# Altium PCB adio.PCBDOC (part 2 of 3)
Units mil, origin at the board's own origin, x right, y up, seen from the top; angles counter-clockwise.
Board outline 7750 x 4500 mil, 6 copper layers (Top Layer, Internal Plane 1, Mid-Layer 1, Mid-Layer 2, Internal Plane 2, Bottom Layer); 163 components, 231 nets, 1195 pads, 503 vias.
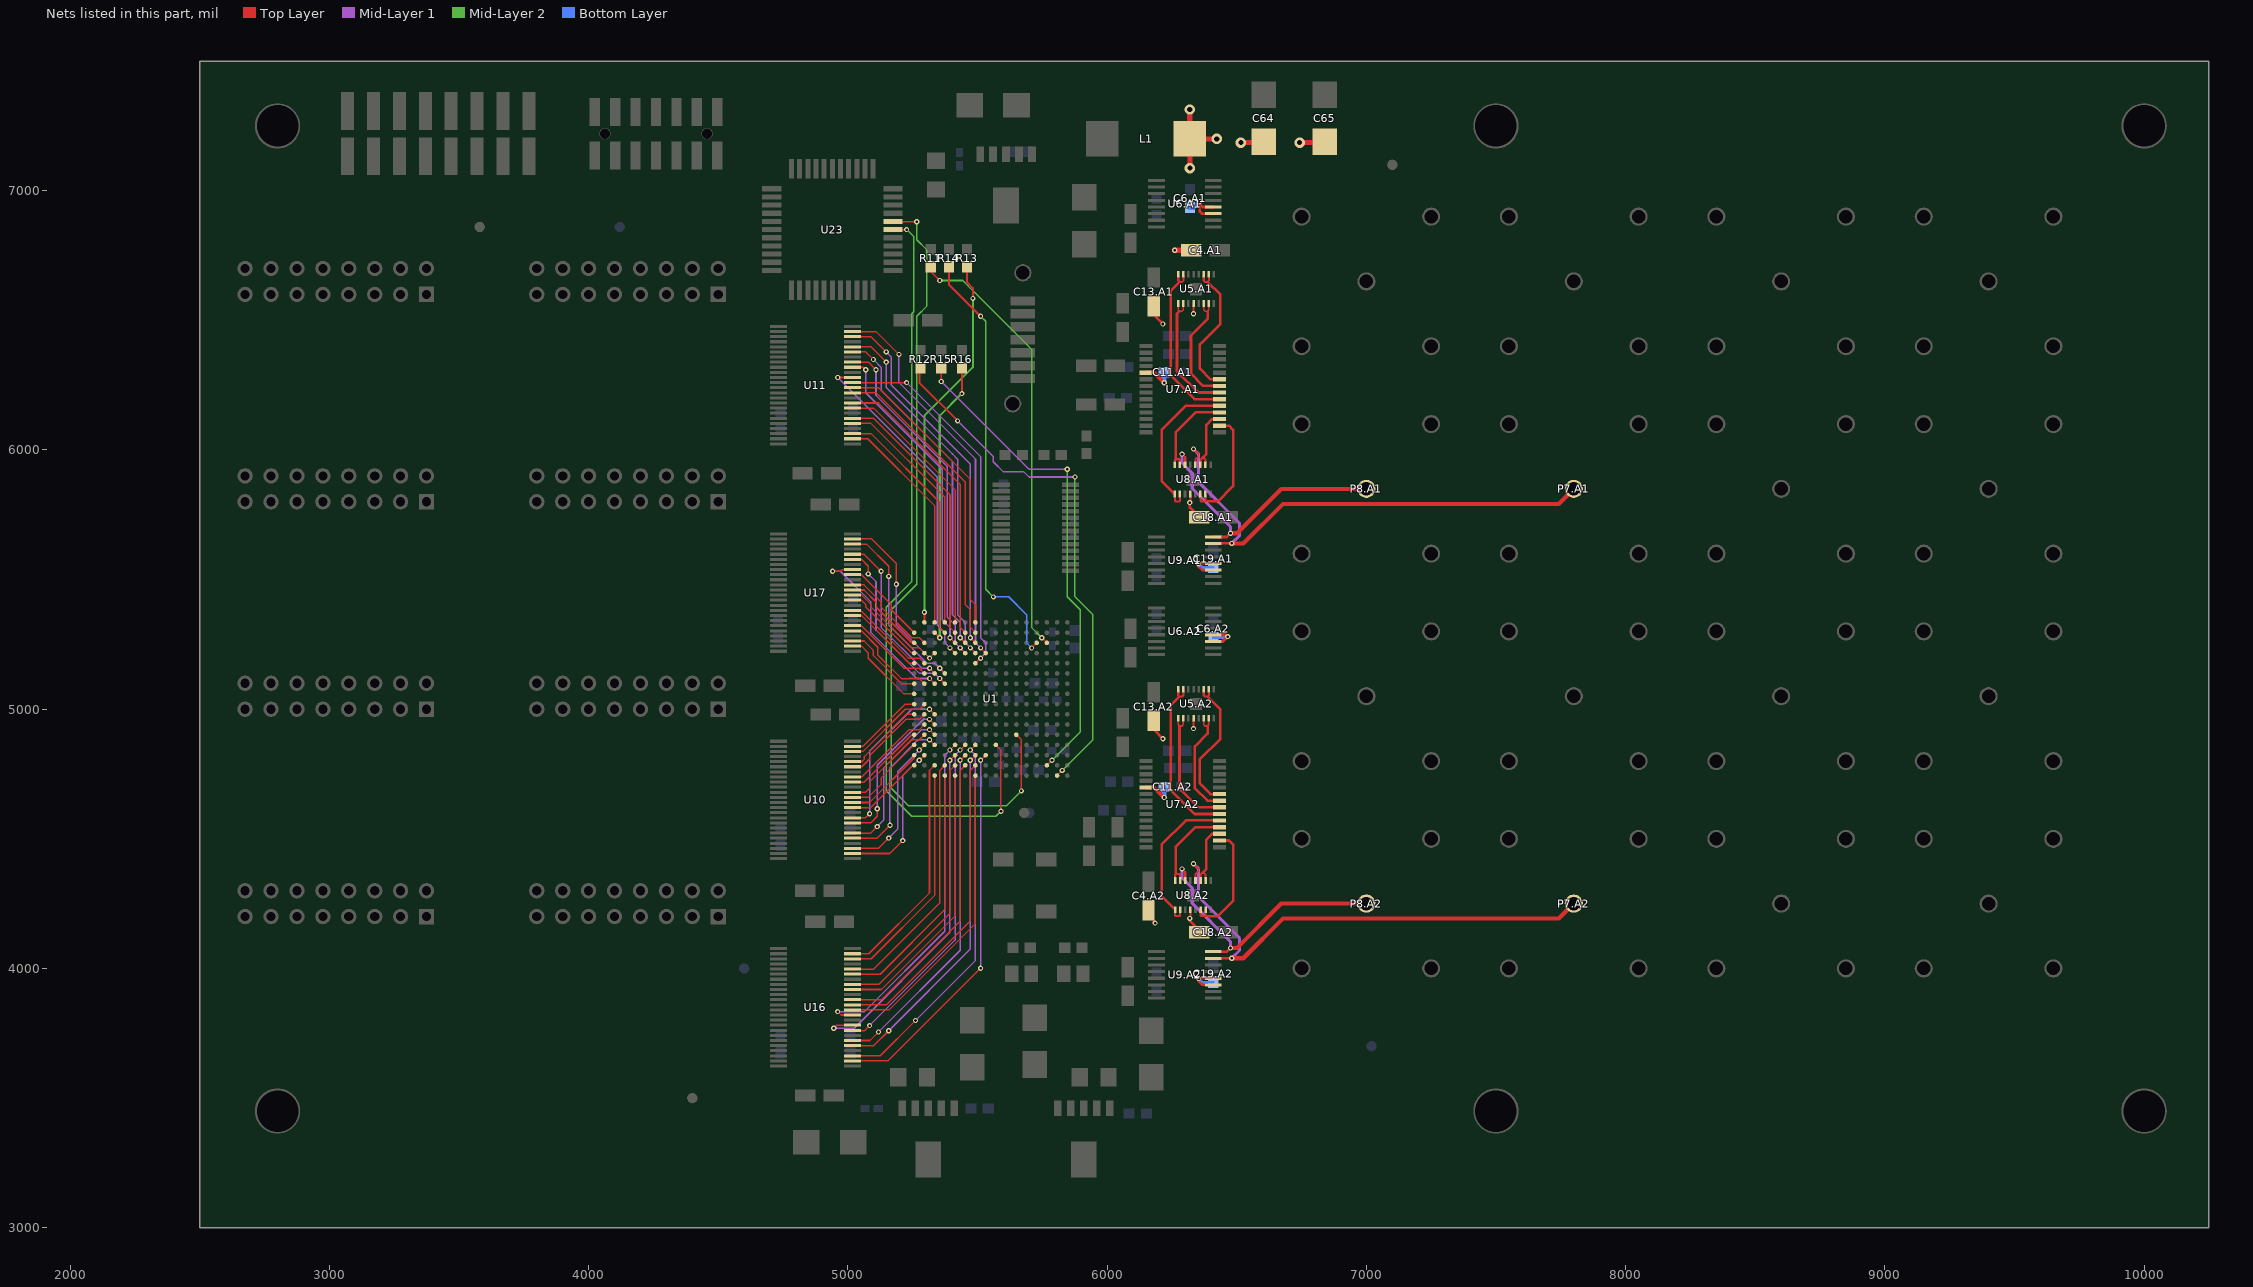
[diagram p6: the nets of this part, all layers, seen from the top]

## Via types
v1: diameter 20, hole 10, Top Layer to Bottom Layer, 322 vias
v2: diameter 20, hole 10, Top Layer to Bottom Layer, tented top, 122 vias
v3: diameter 40, hole 20, Top Layer to Bottom Layer, 57 vias
v4: diameter 40, hole 25, Top Layer to Bottom Layer, 2 vias

## Nets (pads, with @x,y where several pads share a name; then routed paths per layer and width w, separated by ;. In a path a pad name is that pad's centre, name@x,y a point inside that pad or via, vN(x,y) a via of type N, cw(c..) or ccw(c..) an arc to the next point about the centre after c; other vN are vias at no path point) (continued)
ADIO6.A1: P7.A1.1 U8.A1.12 U9.A1.7 | length 2006.7
  Top Layer w8: v1(6333.33,6003.62) 6353.01,5983.94 6353.01,5976.18 6340.63,5963.8 U8.A1.12@6340.63,5940
  Top Layer w10: U9.A1.7@6407.14,5639.47 v1(6480.96,5639.47)
  Top Layer w16: v1(6480.96,5639.47) 6525.25,5639.47 6677.8,5792.02 7742.02,5792.02 P7.A1.1@7800,5850
  Mid-Layer 1 w12: v1(6333.33,6003.62) 6353.01,5983.94 6353.01,5875.67 6510.48,5718.2 6510.48,5668.99 v1(6480.96,5639.47)
ADIO6.A2: P7.A2.1 U8.A2.12 U9.A2.7 | length 2006.7
  Top Layer w8: v1(6333.33,4403.62) 6353.01,4383.94 6353.01,4376.18 6340.63,4363.8 U8.A2.12@6340.63,4340
  Top Layer w10: U9.A2.7@6407.14,4039.47 v1(6480.96,4039.47)
  Top Layer w16: v1(6480.96,4039.47) 6525.25,4039.47 6677.8,4192.02 7742.02,4192.02 P7.A2.1@7800,4250
  Mid-Layer 1 w12: v1(6333.33,4403.62) 6353.01,4383.94 6353.01,4275.67 6510.48,4118.2 6510.48,4068.99 v1(6480.96,4039.47)
ADIO7.A1: P8.A1.1 U8.A1.14 U9.A1.8 | length 1106.4
  Top Layer w8: v1(6289.04,5983.94) 6301.26,5971.71 U8.A1.14@6301.26,5940
  Top Layer w10: U9.A1.8@6407.14,5664.07 6461.27,5664.07 v1(6476.04,5678.83)
  Top Layer w16: v1(6476.04,5678.83) 6500.64,5678.83 6671.81,5850 P8.A1.1@7000,5850
  Mid-Layer 1 w12: v1@6293.96,5983.94 v1(6289.04,5983.94) 6289.04,5949.49 6328.41,5910.12 6328.41,5851.07 6476.04,5703.44 v1(6476.04,5678.83)
ADIO7.A2: P8.A2.1 U8.A2.14 U9.A2.8 | length 1106.4
  Top Layer w8: v1(6289.04,4383.94) 6301.26,4371.71 U8.A2.14@6301.26,4340
  Top Layer w10: U9.A2.8@6407.14,4064.07 6461.27,4064.07 v1(6476.04,4078.83)
  Top Layer w16: v1(6476.04,4078.83) 6500.64,4078.83 6671.81,4250 P8.A2.1@7000,4250
  Mid-Layer 1 w12: v1@6293.96,4383.94 v1(6289.04,4383.94) 6289.04,4349.49 6328.41,4310.12 6328.41,4251.07 6476.04,4103.44 v1(6476.04,4078.83)
AIOBUF0.A1: U5.A1.1 U5.A1.2 U7.A1.7 | length 502.5
  Top Layer w6: U5.A1.1@6274.45,6562.72 6274.45,6539.84 6279.2,6535.09 6289.04,6535.09 6294.13,6540.18 U5.A1.2@6294.13,6562.72
  Top Layer w10: 6279.2,6535.09 6269.69,6525.58 6269.69,6303.47 6351.7,6221.46 U7.A1.7@6433.46,6221.46
AIOBUF0.A2: U5.A2.1 U5.A2.2 U7.A2.7 | length 494.6
  Top Layer w6: U5.A2.1@6274.45,4962.72 6274.45,4939.84 6279.2,4935.09 6289.04,4935.09 6294.13,4940.18 U5.A2.2@6294.13,4962.72
  Top Layer w10: 6279.2,4935.09 6279.2,4693.96 6351.7,4621.46 U7.A2.7@6433.46,4621.46
AIOBUF1.A1: U5.A1.6 U5.A1.7 U7.A1.8 | length 466.2
  Top Layer w6: U5.A1.6@6372.87,6562.72 6372.87,6539.83 6377.62,6535.09 6387.46,6535.09 6392.56,6540.19 U5.A1.7@6392.56,6562.72
  Top Layer w10: 6387.46,6535.09 6387.46,6505.56 6323.48,6441.59 6323.48,6293.96 6370.4,6247.05 U7.A1.8@6433.46,6247.05
AIOBUF1.A2: U5.A2.6 U5.A2.7 U7.A2.8 | length 444.3
  Top Layer w6: U5.A2.6@6372.87,4962.72 6372.87,4939.83 6377.62,4935.09 6387.46,4935.09 6392.56,4940.19 U5.A2.7@6392.56,4962.72
  Top Layer w10: 6387.46,4935.09 6387.46,4905.56 6338.58,4856.69 6338.58,4694.88 6386.42,4647.05 U7.A2.8@6433.46,4647.05
AIOBUF2.A1: U5.A1.10 U5.A1.11 U7.A1.9 | length 547.4
  Top Layer w8: U5.A1.11@6372.87,6674.92 6372.87,6653.02 6377.62,6648.27 6387.46,6648.27 6392.56,6653.37 U5.A1.10@6392.56,6674.92
  Top Layer w10: 6387.46,6648.27 6436.67,6599.06 6436.67,6485.88 6357.93,6407.14 6357.93,6313.64 6398.94,6272.64 U7.A1.9@6433.46,6272.64
AIOBUF2.A2: U5.A2.10 U5.A2.11 U7.A2.9 | length 547.4
  Top Layer w8: U5.A2.11@6372.87,5074.92 6372.87,5053.02 6377.62,5048.27 6387.46,5048.27 6392.56,5053.37 U5.A2.10@6392.56,5074.92
  Top Layer w10: 6387.46,5048.27 6436.67,4999.06 6436.67,4885.88 6357.93,4807.14 6357.93,4713.64 6398.94,4672.64 U7.A2.9@6433.46,4672.64
AIOBUF3.A1: U5.A1.15 U5.A1.16 U7.A1.6 | length 668
  Top Layer w8: U5.A1.16@6274.45,6674.92 6274.45,6653.02 6279.2,6648.27 6289.04,6648.27 6294.13,6653.36 U5.A1.15@6294.13,6674.92
  Top Layer w10: 6279.2,6648.27 6244.75,6613.82 6244.75,6289.04 6337.92,6195.87 U7.A1.6@6433.46,6195.87
AIOBUF3.A2: U5.A2.15 U5.A2.16 U7.A2.6 | length 668
  Top Layer w8: U5.A2.16@6274.45,5074.92 6274.45,5053.02 6279.2,5048.27 6289.04,5048.27 6294.13,5053.36 U5.A2.15@6294.13,5074.92
  Top Layer w10: 6279.2,5048.27 6244.75,5013.82 6244.75,4689.04 6337.92,4595.87 U7.A2.6@6433.46,4595.87
AIOBUF4.A1: U7.A1.5 U8.A1.1 U8.A1.2 | length 609.7
  Top Layer w8: 6255.78,5833.91 6261.89,5827.8 6261.89,5804.4 6264.43,5801.86 6279.2,5801.86 6281.57,5804.24 U8.A1.2@6281.57,5827.8
  Top Layer w10: 6255.78,5833.91 6210.3,5879.38 6210.3,6077.44 6303.8,6170.93 U7.A1.5@6441.59,6170.93
AIOBUF4.A2: U7.A2.5 U8.A2.1 U8.A2.2 | length 609.7
  Top Layer w8: 6255.78,4233.91 6261.89,4227.8 6261.89,4204.4 6264.43,4201.86 6279.2,4201.86 6281.57,4204.24 U8.A2.2@6281.57,4227.8
  Top Layer w10: 6255.78,4233.91 6210.3,4279.38 6210.3,4477.44 6303.8,4570.93 U7.A2.5@6441.59,4570.93
AIOBUF5.A1: U7.A1.2 U8.A1.6 U8.A1.7 | length 477
  Top Layer w8: U8.A1.6@6360.31,5827.8 6360.31,5804.4 6362.85,5801.86 6377.62,5801.86 6380,5804.24 U8.A1.7@6380,5827.8
  Top Layer w10: 6377.62,5801.86 6426.83,5801.86 6485.88,5860.91 6485.88,6077.44 6469.81,6093.5 U7.A1.2@6433.46,6093.5
AIOBUF5.A2: U7.A2.2 U8.A2.6 U8.A2.7 | length 477
  Top Layer w8: U8.A2.6@6360.31,4227.8 6360.31,4204.4 6362.85,4201.86 6377.62,4201.86 6380,4204.24 U8.A2.7@6380,4227.8
  Top Layer w10: 6377.62,4201.86 6426.83,4201.86 6485.88,4260.91 6485.88,4477.44 6469.81,4493.5 U7.A2.2@6433.46,4493.5
AIOBUF6.A1: U7.A1.3 U8.A1.10 U8.A1.11 | length 263.7
  Top Layer w8: U8.A1.11@6360.31,5940 6360.31,5961.71 6367.38,5968.78 6373.09,5968.78 6380,5961.87 U8.A1.10@6380,5940
  Top Layer w10: 6367.38,5968.78 6382.54,5983.94 6382.54,6097.12 6404.51,6119.09 U7.A1.3@6433.46,6119.09
AIOBUF6.A2: U7.A2.3 U8.A2.10 U8.A2.11 | length 263.7
  Top Layer w8: U8.A2.11@6360.31,4340 6360.31,4361.71 6367.38,4368.78 6373.09,4368.78 6380,4361.87 U8.A2.10@6380,4340
  Top Layer w10: 6367.38,4368.78 6382.54,4383.94 6382.54,4497.12 6404.51,4519.09 U7.A2.3@6433.46,4519.09
AIOBUF7.A1: U7.A1.4 U8.A1.15 U8.A1.16 | length 369.6
  Top Layer w8: U8.A1.16@6261.89,5940 6261.89,5961.71 6264.43,5964.25 6279.2,5964.25 6281.57,5961.87 U8.A1.15@6281.57,5940
  Top Layer w10: 6264.43,5964.25 6264.43,6067.59 6341.52,6144.69 U7.A1.4@6433.46,6144.69
AIOBUF7.A2: U7.A2.4 U8.A2.15 U8.A2.16 | length 369.6
  Top Layer w8: U8.A2.16@6261.89,4340 6261.89,4361.71 6264.43,4364.25 6279.2,4364.25 6281.57,4361.87 U8.A2.15@6281.57,4340
  Top Layer w10: 6264.43,4364.25 6264.43,4467.59 6341.52,4544.69 U7.A2.4@6433.46,4544.69
AVDD: C4.A1.1 C4.A2.1 C6.A1.1 C6.A2.1 C11.A1.1 C11.A2.1 C13.A1.1 C13.A2.1 C18.A1.1 C18.A2.1 C19.A1.1 C19.A2.1 C64.1 C65.1 L1.2 U5.A1.4 U5.A2.4 U6.A1.3 U6.A1.4 U6.A2.3 U6.A2.4 U7.A1.19 U7.A2.19 U8.A1.4 U8.A2.4 U9.A1.3 U9.A1.4 U9.A2.3 U9.A2.4 | length 2132.3
  Top Layer w8: C4.A2.1@6175,4205 6175,4230 6169.88,4224.88 C4.A2.1@6160,4224.88 6160,4200 v1(6185,4175) ; v1(6318.56,5796.94) 6320.94,5799.29 U8.A1.4@6320.94,5827.8 ; v1(6318.9,4192.91) 6320.94,4194.96 U8.A2.4@6320.94,4227.8 ; v1(6333.33,4925.25) U5.A2.4@6333.33,4964.61 ; v1(6333.33,6525.25) U5.A1.4@6333.33,6564.61
  Top Layer w10: C13.A2.1@6180,4954.88 6180,4921.1 v1(6215.22,4885.88) ; C13.A1.1@6180,6554.88 6180,6521.1 v1(6215.22,6485.88) ; v1(6318.9,4192.91) 6318.9,4183.58 6354.88,4147.6 C18.A2.1@6354.88,4140 ; v1@6319.12,5796.38 6319.12,5777.93 6354.88,5742.17 C18.A1.1@6354.88,5740 ; v1(6353.01,3960.73) 6353.01,3950.89 6367.28,3936.61 U9.A2.3@6409.25,3936.61 ; v1(6353.01,5560.73) 6353.01,5550.89 6367.28,5536.61 U9.A1.3@6409.25,5536.61 ; v1@6354.49,3962.2 U9.A2.4@6409.25,3962.2 ; v1@6354.49,5562.2 U9.A1.4@6409.25,5562.2 ; 6357.93,6947.05 6367.77,6937.2 U6.A1.4@6409.25,6937.2 ; v1(6357.93,6958.29) 6357.93,6918.93 6365.24,6911.61 U6.A1.3@6409.25,6911.61
  Top Layer w12: U6.A2.3@6409.25,5261.61 6446.61,5261.61 v1(6465,5280) 6457.8,5287.2 U6.A2.4@6409.25,5287.2
  Top Layer w16: U7.A2.19@6150,4698.23 6181.43,4698.23 v1(6220.14,4659.51) ; U7.A1.19@6150,6298.23 6181.43,6298.23 v1(6220.14,6259.51)
  Top Layer w20: v1(6260.81,6770) C4.A1.1@6324.88,6770 ; v3(6319,7313.14) L1.2@6319,7200 v3(6422.71,7200) ; v3(6319.21,7086.96) L1.2@6319.21,7195.23 ; v3(6516.07,7185.39) C64.1@6604.65,7185.39 ; v3(6742.45,7185.39) C65.1@6840.89,7185.39
  Bottom Layer w10: v1(6353.01,3960.73) 6367.28,3946.46 C19.A2.1@6409.25,3946.46 ; v1(6353.01,5560.73) 6367.28,5546.46 C19.A1.1@6409.25,5546.46 ; C6.A2.1@6410,5276.54 v1@6461.54,5276.54
  Bottom Layer w16: v1(6220.14,4659.51) C11.A2.1@6220.14,4698.88 ; v1(6220.14,6259.51) C11.A1.1@6220.14,6298.88 ; C6.A1.1@6318.56,6933.69 6333.33,6933.69 v1(6357.93,6958.29)
DIN0: U1.D8 U11.47 | length 1506.3
  Top Layer w6: U11.47@5017.72,6456.69 5108.83,6456.69 v1(5197.1,6368.42) ; v2(5512.08,5236.48) 5531.5,5217.06 U1.D8@5531.5,5216.54
  Mid-Layer 1 w6: v1(5197.1,6368.42) 5197.1,6260.15 5492.39,5964.86 5492.39,5256.16 v2(5512.08,5236.48)
DIN1: U1.C7 U11.46 | length 1419.5
  Top Layer w6: U11.46@5017.72,6437.01 5089.15,6437.01 v1(5147.89,6378.26) ; v2(5472.71,5275.85) 5472.71,5275.32 U1.C7@5492.13,5255.91
  Mid-Layer 1 w6: v1(5147.89,6378.26) 5167.57,6358.58 5167.57,6250.31 5472.71,5945.17 v2(5472.71,5275.85)
DIN2: U1.D7 U11.44 | length 1419.3
  Top Layer w6: U11.44@5017.72,6397.64 5089.14,6397.64 v1(5147.89,6338.89) ; v2(5472.71,5236.48) 5492.13,5217.06 U1.D7@5492.13,5216.54
  Mid-Layer 1 w6: v1(5147.89,6338.89) 5147.89,6240.46 5403.82,5984.53 ; 5403.54,5984.25 5423.23,5964.57 5423.23,5364.17 5453.02,5334.38 5453.02,5256.16 v2(5472.71,5236.48)
DIN3: U1.C6 U11.43 | length 1330.3
  Top Layer w6: U11.43@5019.93,6378.26 5069.15,6378.26 v1(5098.67,6348.73) ; v2(5433.34,5275.85) 5452.76,5256.43 U1.C6@5452.76,5255.91
  Mid-Layer 1 w6: v1(5098.67,6348.73) 5128.2,6319.21 5128.2,6230.62 5403.82,5955 ; 5403.54,5954.72 5403.54,5364.17 5433.34,5334.38 v2(5433.34,5275.85)
DIN4: U1.D6 U11.41 | length 1338.3
  Top Layer w6: U11.41@5017.72,6338.58 5079.3,6338.58 v1(5108.52,6309.36) ; v2(5433.34,5236.48) 5452.76,5217.06 U1.D6@5452.76,5216.54
  Mid-Layer 1 w6: v1(5108.52,6309.36) 5108.52,6210.38 5383.86,5935.04 5383.86,5354.33 5413.65,5324.54 5413.65,5256.16 v2(5433.34,5236.48)
DIN5: U1.C5 U11.40 | length 1251.1
  Top Layer w6: U11.40@5017.72,6318.9 5059.61,6318.9 v1(5069.15,6309.36) ; v2(5393.96,5275.85) 5413.39,5256.43 U1.C5@5413.39,5255.91
  Mid-Layer 1 w6: v1@5069.45,6309.36 5069.45,6220.47 5344.76,5945.16 ; 5344.49,5944.88 5364.17,5925.2 5364.17,5344.75 5393.96,5314.96 v2(5393.96,5275.85)
DIN6: U1.D5 U11.38 | length 1306.8
  Top Layer w6: v1(4961.18,6279.53) U11.38@5017.72,6279.53 ; v2(5393.96,5236.48) 5413.39,5217.05 U1.D5@5413.39,5216.54
  Mid-Layer 1 w6: v1(4961.18,6279.53) 5315.23,5925.47 ; 5314.96,5925.2 5344.49,5895.67 5344.49,5324.8 5374.02,5295.28 5374.28,5295.28 5374.28,5256.16 v2(5393.96,5236.48)
DIN7: U1.E7 U11.37 | length 1434
  Top Layer w6: U11.37@5017.72,6259.84 v1(5226.38,6259.84) ; U1.E7@5492.13,5177.17 v2(5511.81,5196.85)
  Mid-Layer 1 w6: v1(5226.38,6259.84) 5511.81,5974.41 5511.81,5275.59 5531.5,5255.91 5531.5,5216.54 v2(5511.81,5196.85)
DIN8: U1.A7 U11.36 | length 1160.8
  Top Layer w6: U11.36@5017.72,6240.16 5118.66,6240.16 5472.72,5886.1 ; 5472.44,5885.83 5472.44,5423.5 5492.39,5403.54 U1.A7@5492.39,5334.91
DIN9: U1.B7 U11.35 | length 1175.1
  Top Layer w6: U11.35@5017.72,6220.47 5108.82,6220.47 5452.76,5876.54 5452.76,5403.54 5472.71,5383.59 5472.71,5315.22 5492.13,5295.8 U1.B7@5492.13,5295.28
DIN10: U1.B6 U11.33 | length 1125.2
  Top Layer w6: U11.33@5017.72,6181.1 5118.66,6181.1 5433.34,5866.43 5433.34,5315.22 5452.76,5295.8 U1.B6@5452.76,5295.28
DIN11: U1.A5 U11.32 | length 1038.3
  Top Layer w6: U11.32@5017.72,6161.42 5098.98,6161.42 5413.39,5847.01 U1.A5@5413.39,5334.65
DIN12: U1.B5 U11.30 | length 1038.3
  Top Layer w6: U11.30@5017.72,6122.05 5098.97,6122.05 5393.96,5827.06 5393.96,5315.22 5413.39,5295.8 U1.B5@5413.39,5295.28
DIN13: U1.A4 U11.29 | length 976.7
  Top Layer w6: U11.29@5017.72,6102.36 5089.13,6102.36 5374.28,5817.21 5374.28,5364.44 ; U1.A4@5374.02,5334.65 5374.02,5383.86
DIN14: U1.B4 U11.27 | length 957.1
  Top Layer w6: U11.27@5017.72,6062.99 5089.13,6062.99 5354.33,5797.79 5354.33,5315.48 5374.02,5295.8 U1.B4@5374.02,5295.28
DIN15: U1.A3 U11.26 | length 874.5
  Top Layer w6: U11.26@5017.72,6043.31 5076.69,6043.31 5334.65,5785.35 U1.A3@5334.65,5334.65
DIN16: U1.D3 U17.47 | length 653.8
  Top Layer w6: U17.47@5017.72,5656.69 5091.86,5656.69 5187.26,5561.3 v1@5187.26,5482.28 ; v2(5315.22,5197.1) U1.D3@5334.65,5216.54
  Mid-Layer 1 w6: v1(5187.01,5482.28) 5187.26,5482.03 5187.26,5325.06 v2(5315.22,5197.1)
DIN17: U1.F4 U17.46 | length 696
  Top Layer w6: U17.46@5017.72,5637.01 5072.18,5637.01 5157.73,5551.45 v1(5157.73,5512.08) ; v2(5354.59,5157.73) 5374.02,5138.31 U1.F4@5374.02,5137.8
  Mid-Layer 1 w6: v1(5157.73,5512.08) 5157.73,5325.06 5305.38,5177.42 5334.91,5177.42 v2(5354.59,5157.73)
DIN18: U1.F3 U17.44 | length 634.6
  Top Layer w6: U17.44@5017.72,5597.64 5062.33,5597.64 v1(5128.2,5531.77) ; v2(5315.22,5157.73) 5334.65,5138.31 U1.F3@5334.65,5137.8
  Mid-Layer 1 w6: v1(5128.2,5531.77) 5128.2,5315.22 5285.69,5157.73 v2(5315.22,5157.73)
DIN19: U1.G4 U17.43 | length 682.1
  Top Layer w6: U17.43@5017.72,5577.95 5052.49,5577.95 5078.99,5551.45 v1(5078.99,5521.92) ; v2(5354.59,5118.36) 5374.02,5098.94 U1.G4@5374.02,5098.43
  Mid-Layer 1 w6: v1(5078.99,5521.92) 5108.52,5492.39 5108.52,5305.38 5275.85,5138.05 5334.91,5138.05 v2(5354.59,5118.36)
DIN20: U1.G3 U17.41 | length 721.8
  Top Layer w6: v1(4941.19,5531.77) 4970.72,5531.77 4977.53,5538.58 U17.41@5017.72,5538.58 ; v2(5315.22,5118.36) 5334.65,5098.93 U1.G3@5334.65,5098.43
  Mid-Layer 1 w6: v1(4941.19,5531.77) 4970.72,5531.77 5088.83,5413.65 5088.83,5295.53 5266.01,5118.36 v2(5315.22,5118.36)
DIN21: U1.B1 U17.40 | length 342.6
  Top Layer w6: U17.40@5017.72,5518.9 5052.48,5518.9 5167.57,5403.81 5167.57,5383.61 U1.B1@5255.91,5295.28
DIN22: U1.C2 U17.38 | length 382
  Top Layer w6: U17.38@5017.72,5479.53 5062.32,5479.53 5128.2,5413.65 5128.2,5393.96 5246.32,5275.85 5275.85,5275.85 5275.85,5275.33 U1.C2@5295.28,5255.91
DIN23: U1.C1 U17.37 | length 334.2
  Top Layer w6: U17.37@5017.72,5459.84 5062.32,5459.84 5109.34,5412.82 5109.34,5393.14 5246.58,5255.91 U1.C1@5255.91,5255.91
DIN24: U1.D2 U17.36 | length 376.3
  Top Layer w6: U17.36@5017.72,5440.16 5052.48,5440.16 5088.83,5403.81 5088.83,5393.96 5246.32,5236.48 5275.85,5236.48 5275.85,5235.96 U1.D2@5295.28,5216.54
DIN25: U1.D1 U17.35 | length 328.4
  Top Layer w6: U17.35@5017.72,5420.47 5052.48,5420.47 5069.15,5403.81 5069.15,5393.96 5246.57,5216.54 U1.D1@5255.91,5216.54
DIN26: U1.E2 U17.33 | length 362.3
  Top Layer w6: U17.33@5017.72,5381.1 5049.76,5381.1 5233.76,5197.1 5275.85,5197.1 5275.85,5196.59 U1.E2@5295.28,5177.17
DIN27: U1.E1 U17.32 | length 314.2
  Top Layer w6: U17.32@5017.72,5361.42 5052.48,5361.42 5236.48,5177.42 U1.E1@5255.65,5177.42
DIN28: U1.F2 U17.30 | length 353.9
  Top Layer w6: U17.30@5017.72,5322.05 5052.48,5322.05 5216.79,5157.73 5275.34,5157.73 U1.F2@5295.28,5137.8
DIN29: U1.G2 U17.29 | length 380
  Top Layer w6: U17.29@5017.72,5302.36 5052.47,5302.36 5115.48,5239.35 5115.48,5209.32 5206.69,5118.11 5236.22,5118.11 ; 5236.22,5118.36 5275.85,5118.36 5275.85,5117.85 U1.G2@5295.28,5098.43
DIN30: U1.G1 U17.27 | length 318
  Top Layer w6: U17.27@5017.72,5262.99 5062.31,5262.99 5098.68,5226.63 ; 5098.43,5226.38 5098.43,5206.69 5206.69,5098.43 U1.G1@5255.91,5098.43
DIN31: U1.H1 U17.26 | length 326.2
  Top Layer w6: U17.26@5017.72,5243.31 5052.47,5243.31 5078.99,5216.79 ; 5078.74,5216.54 5078.74,5196.85 5216.54,5059.06 U1.H1@5255.91,5059.06
DOUT0: U1.J1 U10.47 | length 305.6
  Top Layer w6: U10.47@5017.72,4856.69 5058.46,4856.69 5221.7,5019.93 U1.J1@5255.66,5019.93
DOUT1: U1.J2 U10.46 | length 353.2
  Top Layer w6: U10.46@5017.72,4837.01 5058.46,4837.01 5221.7,5000.24 5275.85,5000.24 U1.J2@5295.28,5019.69
DOUT2: U1.K1 U10.44 | length 319.6
  Top Layer w6: U10.44@5017.72,4797.64 5053.54,4797.64 5063.98,4808.07 5063.98,4817.91 5226.38,4980.31 U1.K1@5255.91,4980.31
DOUT3: U1.K2 U10.43 | length 368.7
  Top Layer w6: U10.43@5017.72,4777.95 5053.54,4777.95 5084.04,4808.45 5084.04,4821.01 5223.91,4960.87 5275.85,4960.87 ; 5275.85,4960.89 U1.K2@5295.28,4980.31
DOUT4: U1.L2 U10.41 | length 361.4
  Top Layer w6: U10.41@5017.72,4738.58 5053.56,4738.58 5236.48,4921.5 5275.85,4921.5 U1.L2@5295.28,4940.94
DOUT5: U1.M1 U10.40 | length 313.9
  Top Layer w6: U10.40@5017.72,4718.9 5063.39,4718.9 5246.06,4901.57 U1.M1@5255.91,4901.57
DOUT6: U1.M2 U10.38 | length 383.9
  Top Layer w6: U10.38@5017.72,4679.53 5068.31,4679.53 5083.66,4694.88 5083.66,4719.49 5246.3,4882.13 5275.83,4882.13 U1.M2@5295.28,4901.57
DOUT7: U1.N1 U10.37 | length 336.4
  Top Layer w6: U10.37@5017.72,4659.84 5078.15,4659.84 5127.95,4709.65 5127.95,4734.25 5236.22,4842.52 U1.N1@5255.91,4862.2
DOUT8: U1.P1 U10.36 | length 319.6
  Top Layer w6: U10.36@5017.72,4640.16 5083.07,4640.16 5255.91,4812.99 U1.P1@5255.91,4822.83
DOUT9: U1.R1 U10.35 | length 305.7
  Top Layer w6: U10.35@5017.72,4620.47 5087.99,4620.47 5250.98,4783.46 U1.R1@5255.91,4783.46
DOUT10: U1.K3 U10.33 | length 639.9
  Top Layer w6: U10.33@5017.72,4581.1 5068.31,4581.1 v1(5083.66,4596.46) ; v2(5314.96,5000) U1.K3@5334.65,4980.31
  Mid-Layer 1 w6: v1(5083.66,4596.46) 5083.66,4837.6 5246.06,5000 v2(5314.96,5000)
DOUT11: U1.L3 U10.32 | length 605.8
  Top Layer w6: U10.32@5017.72,4561.42 5087.99,4561.42 5113.19,4586.61 v1(5113.19,4616.14) ; v2(5314.96,4960.63) U1.L3@5334.65,4940.94
  Mid-Layer 1 w6: v1(5113.19,4616.14) 5113.19,4783.46 5290.35,4960.63 v2(5314.96,4960.63)
DOUT12: U1.M3 U10.30 | length 608.6
  Top Layer w6: U10.30@5017.72,4522.05 5087.99,4522.05 v1(5113.19,4547.24) ; v2(5314.96,4921.26) U1.M3@5334.65,4901.57
  Mid-Layer 1 w6: v1(5113.19,4547.24) 5137.8,4571.85 5137.8,4773.62 5285.43,4921.26 v2(5314.96,4921.26)
DOUT13: U1.N3 U10.29 | length 609.8
  Top Layer w6: U10.29@5019.69,4502.95 5113.19,4502.95 v1(5162.4,4552.17) ; v2(5314.96,4881.89) U1.N3@5334.65,4862.2
  Mid-Layer 1 w6: v1(5162.4,4552.17) 5162.4,4773.62 5270.67,4881.89 v2(5314.96,4881.89)
DOUT14: U1.N2 U10.27 | length 572.6
  Top Layer w6: U10.27@5017.72,4462.99 5117.52,4462.99 v1(5157.48,4502.95) ; v2(5275.59,4842.52) U1.N2@5295.28,4862.2
  Mid-Layer 1 w6: v1(5157.48,4502.95) 5191.93,4537.4 5191.93,4758.86 v2(5275.59,4842.52)
DOUT15: U1.P2 U10.26 | length 576.9
  Top Layer w6: U10.26@5017.72,4443.31 5161.81,4443.31 v1(5211.61,4493.11) ; v2(5275.59,4803.15) U1.P2@5295.28,4822.83
  Mid-Layer 1 w6: v1(5211.61,4493.11) 5211.61,4744.09 v2@5270.67,4803.15
DOUT16: U1.R3 U16.47 | length 894.7
  Top Layer w6: U16.47@5017.72,4056.69 5080.31,4056.69 5314.96,4291.34 5314.96,4763.78 U1.R3@5334.65,4783.46
DOUT17: U1.T3 U16.46 | length 880.8
  Top Layer w6: U16.46@5017.72,4037.01 5090.16,4037.01 5334.65,4281.5 U1.T3@5334.65,4744.09
DOUT18: U1.R4 U16.44 | length 981.6
  Top Layer w6: U16.44@5017.72,3997.64 5100,3997.64 5354.33,4251.97 5354.33,4763.78 U1.R4@5374.02,4783.46
DOUT19: U1.T4 U16.43 | length 976.3
  Top Layer w6: U16.43@5017.72,3977.95 5124.61,3977.95 5374.02,4227.36 U1.T4@5374.02,4744.09
DOUT20: U1.R5 U16.41 | length 1068.5
  Top Layer w6: U16.41@5017.72,3938.58 5119.69,3938.58 5393.7,4212.6 5393.7,4763.78 U1.R5@5413.39,4783.46
DOUT21: U1.T5 U16.40 | length 1054.6
  Top Layer w6: U16.40@5017.72,3918.9 5129.53,3918.9 5413.39,4202.76 U1.T5@5413.39,4744.09
DOUT22: U1.R6 U16.38 | length 1149.6
  Top Layer w6: U16.38@5017.72,3879.53 5129.53,3879.53 5433.07,4183.07 5433.07,4763.78 U1.R6@5452.76,4783.46
DOUT23: U1.R7 U16.37 | length 1197.2
  Top Layer w6: U16.37@5017.72,3859.84 5149.21,3859.84 5472.44,4183.07 5472.44,4763.78 U1.R7@5492.13,4783.46
DOUT24: U1.T7 U16.36 | length 1183.2
  Top Layer w6: U16.36@5017.72,3840.16 5159.06,3840.16 5492.13,4173.23 U1.T7@5492.13,4744.09
DOUT25: U1.N5 U16.35 | length 1339.2
  Top Layer w6: v1(4960.63,3833.66) 4973.82,3820.47 U16.35@5017.72,3820.47 ; v2(5393.7,4842.52) U1.N5@5413.39,4862.2
  Mid-Layer 1 w6: v1(4960.63,3833.66) 5063.98,3833.66 5374.02,4143.7 5374.02,4822.83 v2(5393.7,4842.52)
DOUT26: U1.P5 U16.33 | length 1369.5
  Top Layer w6: v1(4945.87,3769.68) 4957.28,3781.1 U16.33@5017.72,3781.1 ; v2(5393.7,4803.15) U1.P5@5413.39,4822.83
  Mid-Layer 1 w6: v1(4945.87,3769.68) 5024.61,3769.68 5393.7,4138.78 v2(5393.7,4803.15)
DOUT27: U1.N6 U16.32 | length 1312.6
  Top Layer w6: U16.32@5014.76,3759.84 5063.98,3759.84 v1(5083.66,3779.53) ; v2(5433.07,4842.52) U1.N6@5452.76,4862.2
  Mid-Layer 1 w6: v1(5083.66,3779.53) 5413.39,4109.25 5413.39,4822.83 v2(5433.07,4842.52)
DOUT28: U1.P6 U16.30 | length 1320.5
  Top Layer w6: U16.30@5017.72,3722.05 5085.24,3722.05 v1(5118.11,3754.92) ; v2(5433.07,4803.15) U1.P6@5452.76,4822.83
  Mid-Layer 1 w6: v1(5118.11,3754.92) 5433.07,4069.88 v2(5433.07,4803.15)
DOUT29: U1.P7 U16.29 | length 1365.2
  Top Layer w6: U16.29@5017.72,3702.36 5100,3702.36 v1(5157.48,3759.84) ; v2(5472.44,4803.15) U1.P7@5492.13,4822.83
  Mid-Layer 1 w6: v1(5157.48,3759.84) 5472.44,4074.8 v2(5472.44,4803.15)
DOUT30: U1.N7 U16.27 | length 1474.6
  Top Layer w6: U16.27@5017.72,3662.99 5124.61,3662.99 v1(5260.83,3799.21) ; v2(5472.44,4842.52) U1.N7@5492.13,4862.2
  Mid-Layer 1 w6: v1(5260.83,3799.21) 5492.13,4030.51 5492.13,4822.83 v2(5472.44,4842.52)
DOUT31: U1.P8 U16.26 | length 1472.3
  Top Layer w6: U16.26@5017.72,3643.31 5154.13,3643.31 v1(5511.81,4000.98) ; v2(5511.81,4803.15) U1.P8@5531.5,4822.83
  Mid-Layer 1 w6: v1(5511.81,4000.98) v2(5511.81,4803.15)
FCCLK: R12.2 U1.T15 | length 2052.5
  Top Layer w6: U1.T15@5807.09,4744.09 v2(5826.77,4763.78)
  Top Layer w8: R12.2@5275.59,6312.13 5275.59,6259.84 v1(5423.23,6112.2)
  Mid-Layer 1 w6: v1(5423.23,6112.2) 5561.02,5974.41 5561.02,5954.72 5600.39,5915.35 5679.13,5915.35 5698.82,5895.67 v1(5875.98,5895.67)
  Mid-Layer 2 w6: v2(5826.77,4763.78) 5945.17,4882.18 5945.17,5364.15 5875.98,5433.34 v1(5875.98,5895.67)
FDIN: U1.M11 U23.40 | length 3125
  Top Layer w6: U23.40@5177.17,6879.92 v1(5265.75,6879.92) ; U1.M11@5649.61,4901.57 5669.29,4881.89 v1(5669.29,4685.04)
  Mid-Layer 2 w6: v1(5265.75,6879.92) 5265.75,6811.02 5305.12,6771.65 5305.12,6555.12 5265.75,6515.75 5265.75,5482.28 5167.32,5383.86 5167.32,4694.88 5234.17,4628.03 5612.28,4628.03 v1(5669.29,4685.04)
FDONE: R15.2 U1.R14 | length 1902.7
  Top Layer w6: v1(5360,6264.02) R15.2@5360,6324.57 ; U1.R14@5767.72,4783.46 v2(5787.4,4803.15)
  Mid-Layer 1 w6: v1(5360,6264.02) 5698.82,5925.2 v1(5846.46,5925.2)
  Mid-Layer 2 w6: v2(5787.4,4803.15) 5895.96,4911.7 5895.96,5383.84 5846.46,5433.34 v1(5846.46,5925.2)
FINIT: U1.N9 U23.39 | length 3028.5
  Top Layer w6: U23.39@5174.25,6850 v1(5226.77,6850) ; U1.N9@5570.87,4862.2 5590.55,4842.52 v1(5590.55,4606.3)
  Mid-Layer 2 w6: v1(5226.77,6850) 5253.75,6823.02 5253.75,6533.28 5246.06,6525.59 5246.06,5492.13 5147.64,5393.7 5147.64,4685.04 5246.06,4586.61 5570.87,4586.61 v1(5590.55,4606.3)
FPROG: R16.2 U1.B3 | length 1108.3
  Top Layer w8: U1.B3@5334.65,5295.28 v2(5354.33,5275.59) ; v1@5440,6213.54 R16.2@5440,6316.54
  Mid-Layer 2 w8: v2(5354.33,5275.59) 5354.33,6131.89 v1(5440,6217.56)
FTCK: R11.2 U1.C14 | length 1688
  Top Layer w6: R11.2@5320,6706.54 5320,6687.87 v1(5354.33,6653.54) ; v2(5748.03,5275.59) U1.C14@5767.72,5255.91
  Mid-Layer 2 w6: v1(5354.33,6653.54) 5442.91,6653.54 5695.71,6400.75 5708.66,6387.8 5708.66,5314.96 v2(5748.03,5275.59)
FTDI: R13.2 U1.A2 | length 1458.6
  Top Layer w8: U1.A2@5295.28,5334.65 v2(5295.28,5374.02) ; R13.2@5460,6706.54 5460,6646.3 5482.28,6624.02 v1(5482.28,6584.65)
  Mid-Layer 2 w8: v2(5295.28,5374.02) 5295.28,6131.89 5482.28,6318.9 v1(5482.28,6584.65)
FTMS: R14.1 U1.C13 | length 1664.9
  Top Layer w6: v2(5708.66,5236.22) U1.C13@5728.35,5255.91
  Top Layer w8: R14.1@5390,6706.54 5390,6637.56 v1(5511.81,6515.75)
  Mid-Layer 2 w6: v1(5511.81,6515.75) 5531.5,6496.06 5531.5,5462.6 v1@5561.03,5433.07
  Bottom Layer w6: v1(5561.3,5433.34) 5620.35,5433.34 5689.25,5364.44 5689.25,5255.63 v2(5708.66,5236.22)

## Text inside footprints (layer, text, board x,y; h text height)
JP1: Bottom Overlay "16" at 3740,5080 h50; Bottom Overlay "15" at 3740,4980 h50; Bottom Overlay "1" at 4600,4980 h50; Bottom Overlay "2" at 4600,5080 h50
JP2: Bottom Overlay "16" at 3740,6680 h50; Bottom Overlay "15" at 3740,6580 h50; Bottom Overlay "1" at 4600,6580 h50; Bottom Overlay "2" at 4600,6680 h50
JP3: Bottom Overlay "16" at 2615,5080 h50; Bottom Overlay "15" at 2615,4980 h50; Bottom Overlay "1" at 3475,4980 h50; Bottom Overlay "2" at 3475,5080 h50
JP4: Bottom Overlay "1" at 3475,6580 h50; Bottom Overlay "2" at 3475,6680 h50
JP5: Bottom Overlay "16" at 3740,4280 h50; Bottom Overlay "15" at 3740,4180 h50; Bottom Overlay "1" at 4600,4180 h50; Bottom Overlay "2" at 4600,4280 h50
JP6: Bottom Overlay "16" at 3740,5880 h50; Bottom Overlay "15" at 3740,5780 h50; Bottom Overlay "1" at 4600,5780 h50; Bottom Overlay "2" at 4600,5880 h50
JP7: Bottom Overlay "1" at 3475,4180 h50; Bottom Overlay "2" at 3475,4280 h50
JP8: Bottom Overlay "1" at 3475,5780 h50; Bottom Overlay "2" at 3475,5880 h50